# Altium PCB SHT1x.PcbDoc
Units mm, origin at the board's own origin, x right, y up, seen from the top; angles counter-clockwise.
Board outline 17.5 x 17.5 mm, 2 copper layers (Top Layer, Bottom Layer); 4 components, 4 nets, 24 pads, 0 vias.
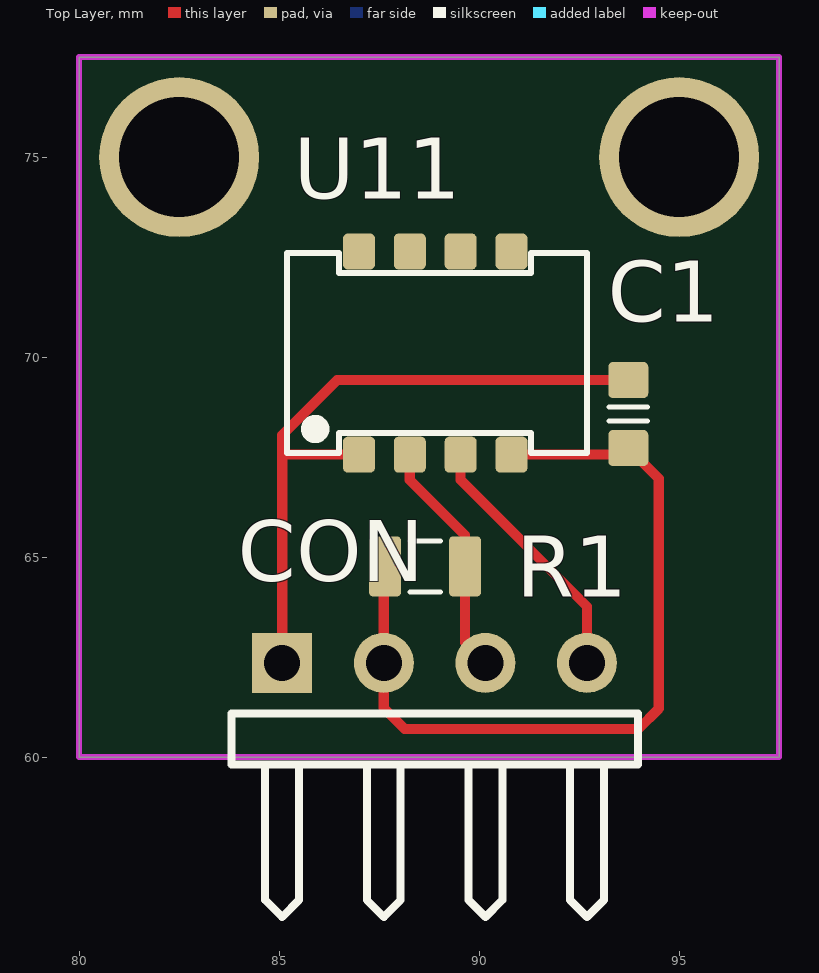
[diagram p0: Top Layer view]
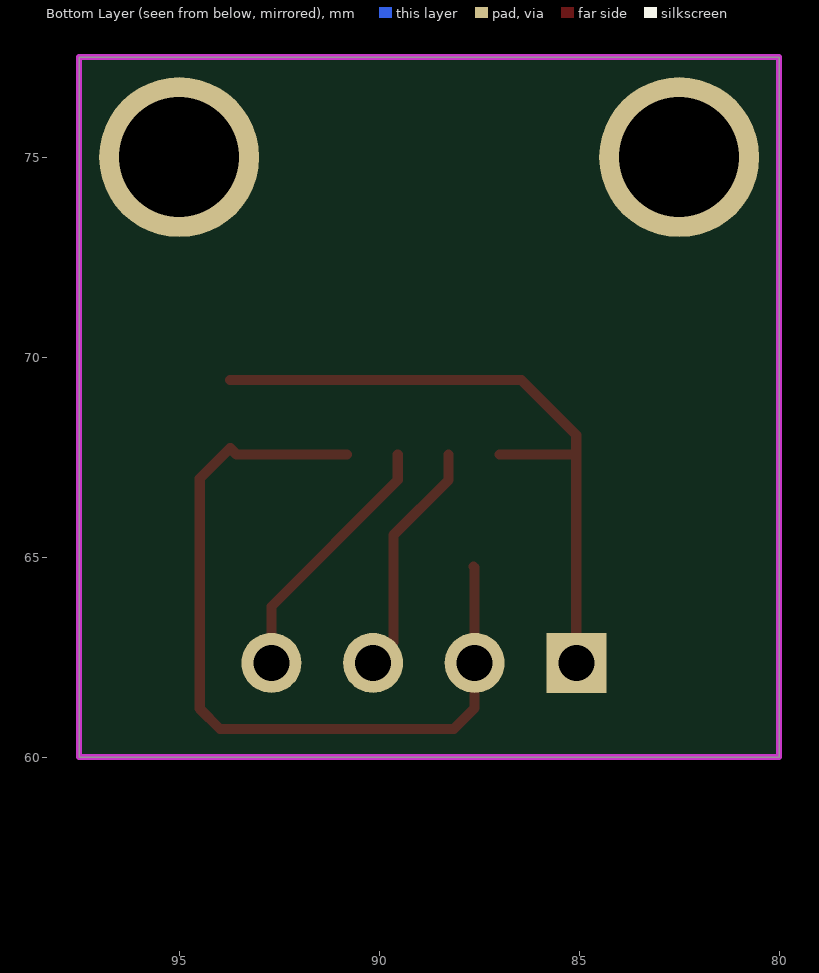
[diagram p1: Bottom Layer view, seen from below]

## Layer stack, top to bottom
Top Solder: solder mask 0.0102, Solder Resist, Dk 3.5
Top Layer: signal copper 0.0356
Dielectric 1: dielectric 0.32, FR-4, Dk 4.8
Bottom Layer: signal copper 0.0356
Bottom Solder: solder mask 0.0102, Solder Resist, Dk 3.5

## Board outline
80,60 97.5,60 97.5,77.5 80,77.5

## Design rules (kind name [scope] priority, off if disabled: settings)
Clearance [All] p1: gap=0.254
PolygonConnect [All] p1: connectstyle=Relief reliefconductorwidth=0.254 reliefentries=4 polygonreliefangle="90 Angle" airgapwidth=0.254
RoutingVias [All] p1: holewidth=0.711 width=1.27 viastyle="Through Hole" minholewidth=0.711 minwidth=1.27 maxholewidth=0.711 maxwidth=1.27
SolderMaskExpansion [All] p1: expansion=0.102
Width [All] p1: maxlimit=0.254 minlimit=0.254 preferedwidth=0.254
30 further rules are at their usual default settings.

## Components (designator, comment, footprint, x,y, rotation, side; value= is the part's Value field where it differs from the comment)
C1 "CAP NP" CAPC1608N 93.726,68.58 r90 top
CON "Header 4H" HDR1X4H 85.074,62.357 r0 top
R1 "Res" RESC2012N_F 88.646,64.77 r180 top
U11 "SHT1x" SHT1x 88.9,70.104 r90 top

## Footprints (in the part's own frame and the unit in brackets; to place one, negate y for a bottom-side part, rotate by r counter-clockwise, add the part's x,y. Pads: shape width x height; smd on the part's side, far side on the other; paste and mask are expansions set on the pad)
CAPC1608N [mm] "Chip Capacitor, Body 1.6x0.8mm, 0603, IPC Medium Density"
  round 0.254 on Mech14: 0(0,0)
  rrect25% 0.9x1 smd: 1(-0.85,0) 2(0.85,0)
  Top Layer pour cut-out: -0.4,0.6 0.4,0.6 0.4,-0.6 -0.4,-0.6
  silkscreen extent -0.18,-0.48 0.18,0.48, body extent -0.85,-0.45 0.85,0.45, height 0.89
HDR1X4H [mm] "Connector; Header; 4 Position; Right Angle"
  rect 1.5x1.5 hole 0.9: 1(0,0)
  round 1.5 hole 0.9: 2(2.54,0) 3(5.08,0) 4(7.62,0)
  silkscreen extent -1.27,-6.35 8.89,-1.27, body extent -1.27,-7 8.89,1.27, height 4.33
RESC2012N_F [mm] "Chip Resistor, Body 2.0x1.2mm, 0805, IPC Medium Density"
  round 0.254 on Mech14: 0(0,0)
  rrect25% 1x1.3 on Top Solder: 1(-1,0) 1(1,0)
  rrect25% 0.8x1.5 smd paste-1: 1(-1,0) 2(1,0)
  rrect25% 0.8x1.3 on Top Paste: 1(-1,0) 1(1,0)
  Top Layer pour cut-out: -0.6,0.75 0.6,0.75 0.6,-0.75 -0.6,-0.75
  silkscreen extent -0.38,-0.64 0.38,0.64, body extent -1.1,-0.67 1.1,0.68, height 0.69
SHT1x [mm]
  rrect30% 0.9x0.8 smd: 1(-2.54,1.905) 2(-2.54,0.635) 3(-2.54,-0.635) 4(-2.54,-1.905) 5(2.54,-1.905) 6(2.54,-0.635) 7(2.54,0.635) 8(2.54,1.905)
  silkscreen extent -2.5,-3.8 2.5,3.7, body extent -2.5,-3.8 2.5,3.7, height 2.51

## Part data
CON: "Header, 4-Pin, Right Angle"

## Free pads (board coordinates)
  round 4 hole 3: 0(82.5,75) 1(95,75)

## Nets (pads, with @x,y where several pads share a name; then routed paths per layer and width w, separated by ;. In a path a pad name is that pad's centre, name@x,y a point inside that pad or via, vN(x,y) a via of type N, cw(c..) or ccw(c..) an arc to the next point about the centre after c; other vN are vias at no path point)
DATA: CON.3 R1.1@89.646,64.77 U11.2 | length 6
  Top Layer w0.254: U11.2 88.265,66.929 89.646,65.548 89.646,64.77 89.646,62.865 CON.3
GND: C1.2 CON.1 U11.1 | length 16.8
  Top Layer w0.254: CON.1 85.074,67.564 ; U11.1 85.074,67.564 ; C1.2 86.448,69.43 85.074,68.056 85.074,67.564
SCK: CON.4 U11.3 | length 6.5
  Top Layer w0.254: U11.3 89.535,66.929 92.694,63.77 CON.4
VCC: C1.1 CON.2 R1.2 U11.4 | length 20.7
  Top Layer w0.254: R1.2 87.614,64.738 CON.2 87.614,61.23 88.138,60.706 93.98,60.706 94.488,61.214 94.488,66.968 C1.1 93.56,67.564 U11.4
pads on no net: C1.0 R1.0 R1.1@87.646,64.77 R1.1@89.646,64.77 U11.5 U11.6 U11.7 U11.8

## Keep-outs
Keep-Out Layer:
  lines w0.15: 80,60 82.5,60 97.5,60 97.5,77.5 80,77.5 80,60